# Altium PCB SolarPanel_+X_v2.PcbDoc
Units mm, origin at the board's own origin, x right, y up, seen from the top; angles counter-clockwise.
Board outline 320.5 x 82 mm, 4 copper layers (Top Layer, Power 1, Power 2, Bottom Layer), stack 1.578 mm thick; 8 components, 5 nets, 42 pads, 144 vias.
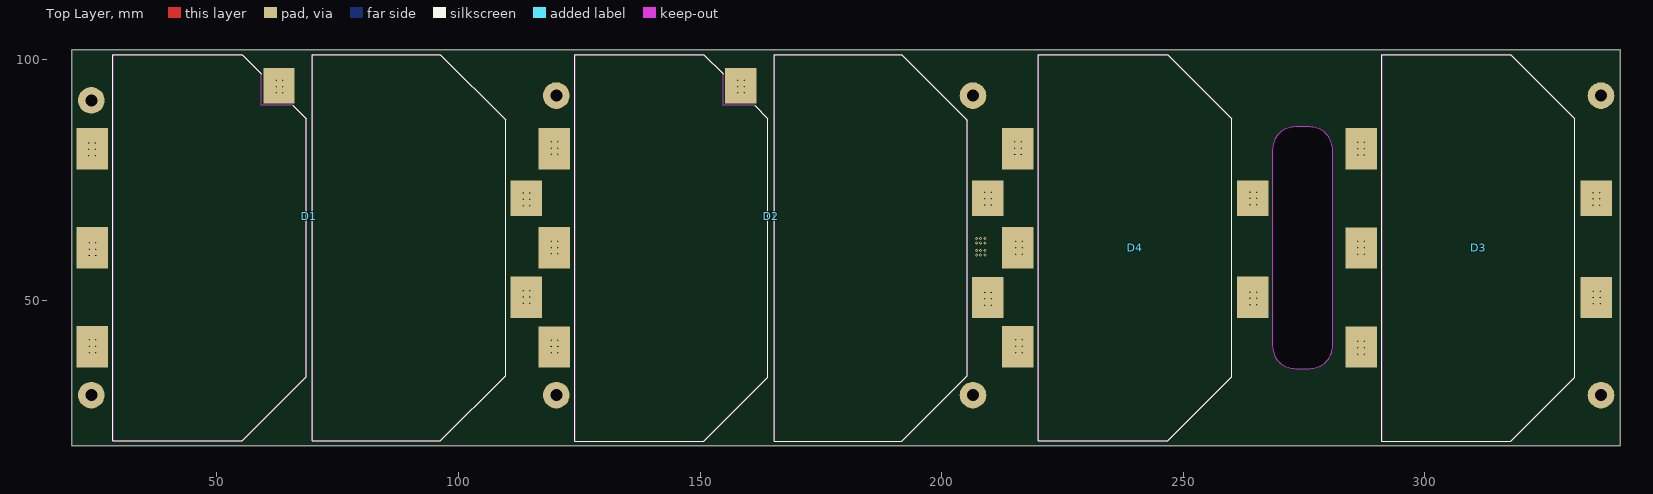
[diagram p0: Top Layer view]
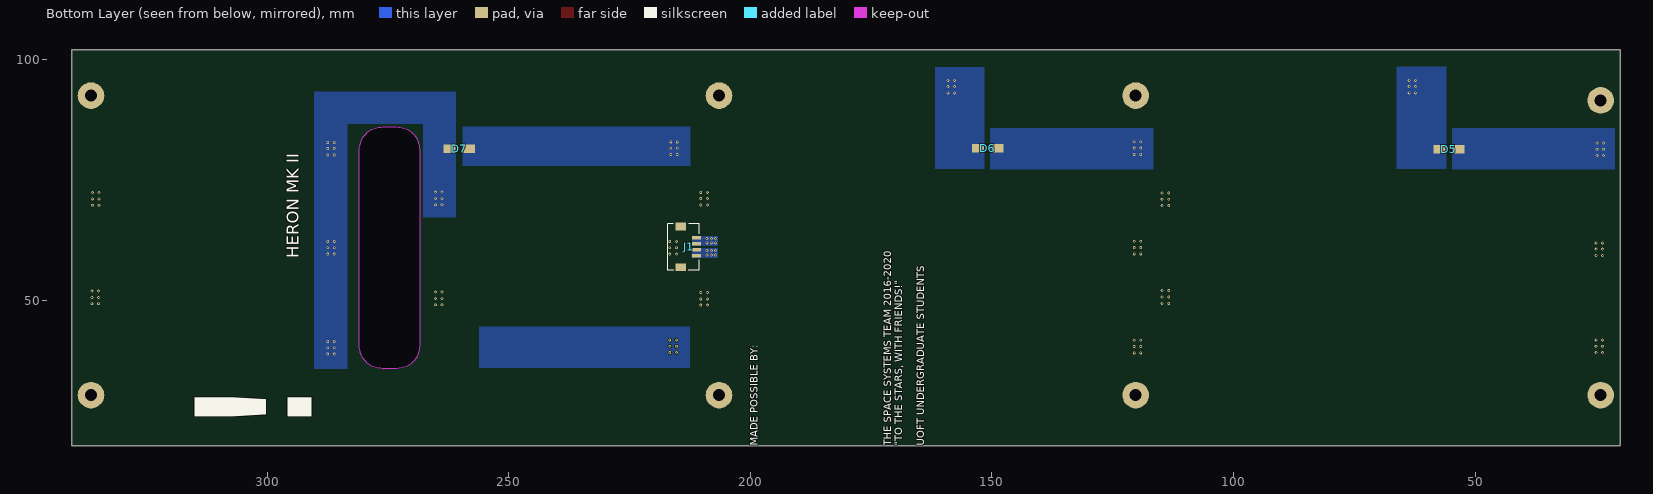
[diagram p1: Bottom Layer view, seen from below]
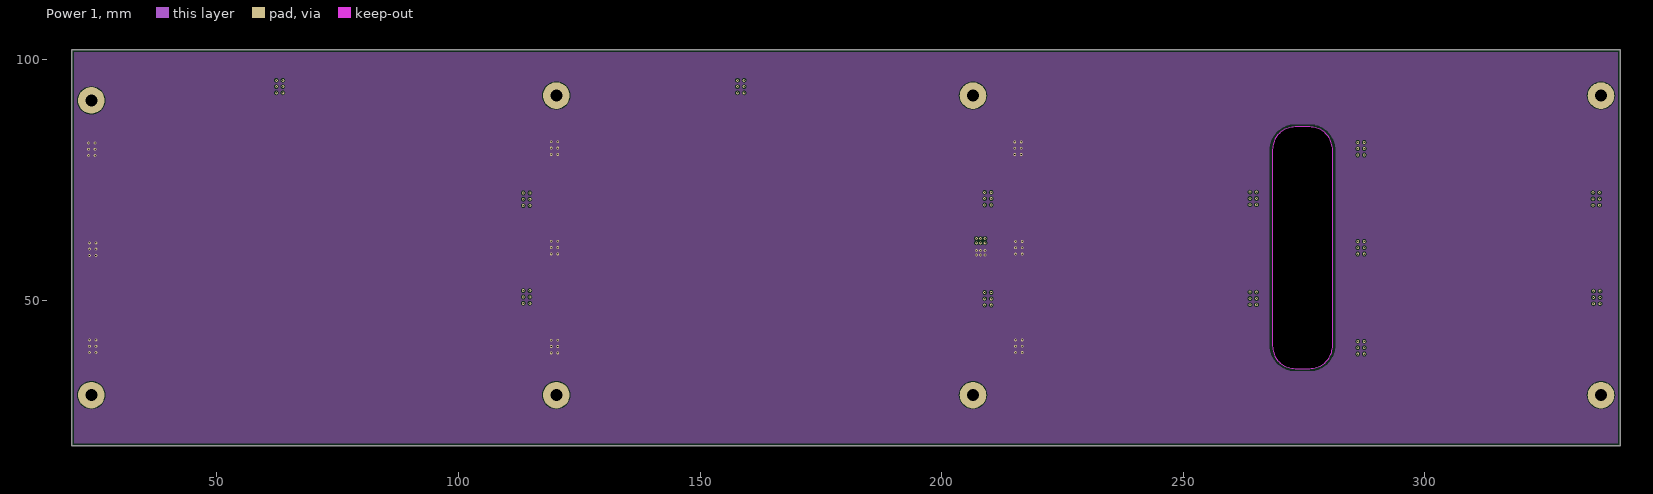
[diagram p2: Power 1]
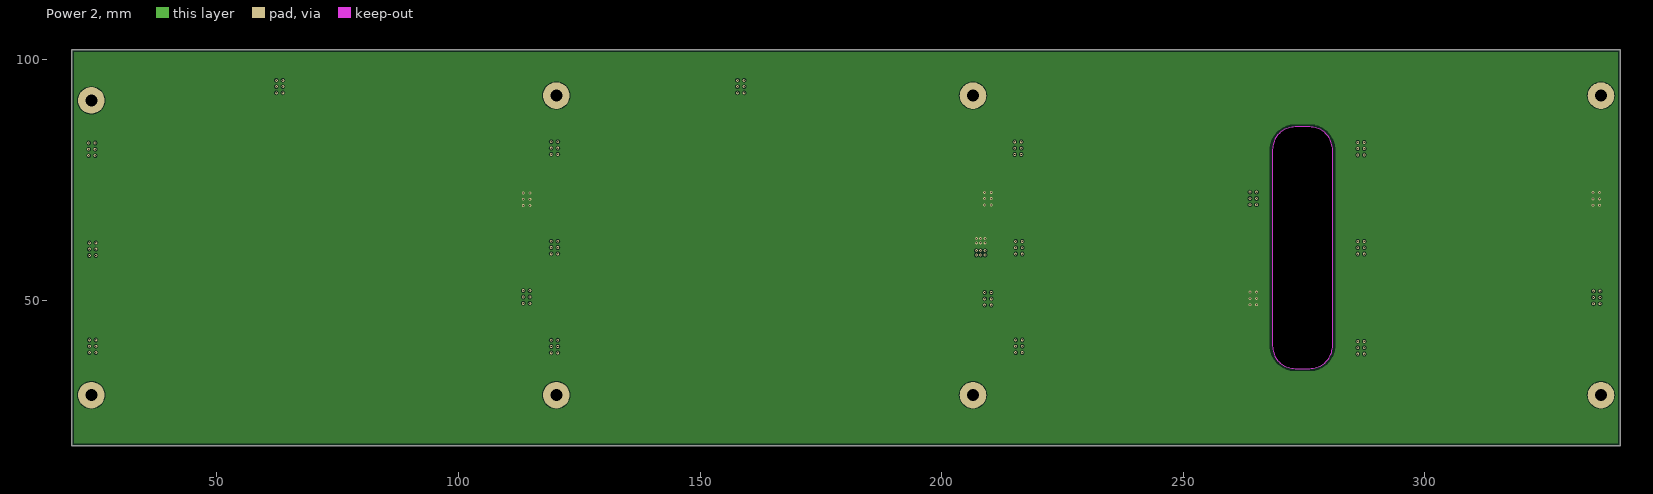
[diagram p3: Power 2]
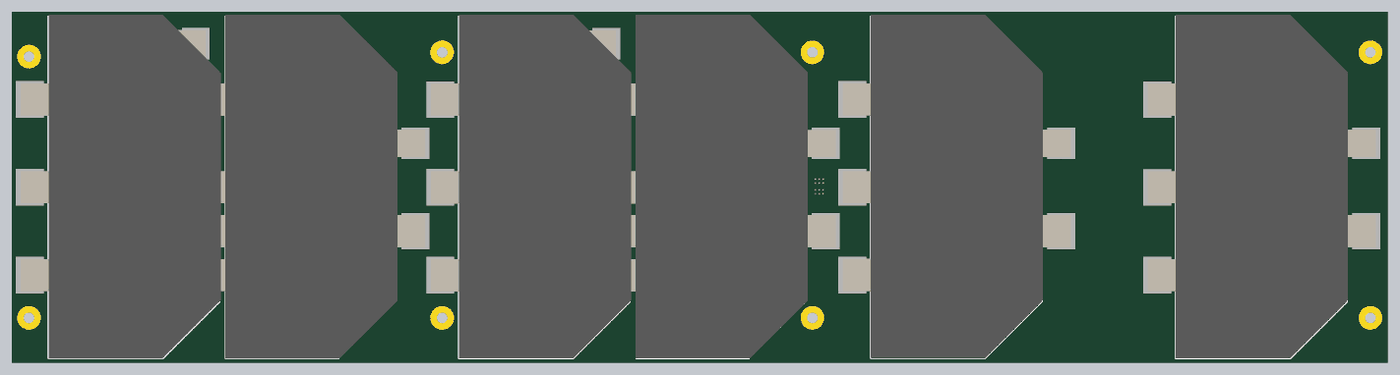
[diagram p4: 3D render of the assembled board from above, using the file's embedded part models]

## Layer stack, top to bottom
Top Solder: solder mask 0.0102, Solder Resist, Dk 3.5
Top Layer: signal copper 0.0356
Dielectric 1: core 0.254, FR-4, Dk 4.2
Power 1: signal copper 0.036
Dielectric 3: prepreg 0.927, Dk 4.2
Power 2: signal copper 0.036
Dielectric 2: core 0.254, Dk 4.2
Bottom Layer: signal copper 0.0356
Bottom Solder: solder mask 0.0102, Solder Resist, Dk 3.5

## Board outline
20,20 340.5,20 340.5,102 20,102
cut-out: 276.2,36 ccw(c276.2,40.75) 280.95,40.75 280.95,81.25 ccw(c276.191,81.241) 276.2,86 273.2,86 ccw(c273.2,81.29) 268.49,81.29 268.49,40.71 ccw(c273.2,40.71) 273.2,36

## Design rules (kind name [scope] priority, off if disabled: settings)
AssemblyTestPointUsage [All] p1 off:
AssemblyTestpoint [All] p1 off: testpointundercomponent=TRUE minsize=1.016 maxsize=2.54 preferedsize=1.524 minholesize=0 maxholesize=1.016 preferedholesize=0.813 testpointgrid=0.025 usegrid=TRUE gridtolerance=0 allowsidetop=TRUE allowsidebottom=TRUE
BoardOutlineClearance [All] p1: gap=0.5 ignorepadtopadclearanceinfootprint=FALSE
Clearance "Stitching GND" [IsStitchingVia and InNet('GND') vs (IsVia and (Not IsStitchingVia)) Or IsPad] p1: gap=0 ignorepadtopadclearanceinfootprint=TRUE
Clearance Component_Clearance [IsComponent vs IsComponent] p2: gap=0.254 ignorepadtopadclearanceinfootprint=FALSE
Clearance [All] p3: gap=0.152 ignorepadtopadclearanceinfootprint=TRUE
FabricationTestPointUsage [All] p1 off: valid=0 allowmultiple=FALSE
FabricationTestpoint [All] p1 off: side=3 testpointundercomponent=FALSE minsize=1.016 maxsize=2.54 preferedsize=1.524 minholesize=0 maxholesize=1.016 preferedholesize=0.813 testpointgrid=0.025 allowsidetop=TRUE allowsidebottom=TRUE usegrid=TRUE gridtolerance=0
HoleSize [All] p1: absolutevalues=TRUE maxlimit=6.3 minlimit=0.3 maxpercent=80.000 minpercent=20.000
HoleToHoleClearance [All] p1: gap=0.2 allowstackedmicrovias=FALSE
MinimumAnnularRing [All] p1: minimumring=0.15
MinimumSolderMaskSliver [All] p1: minsoldermaskwidth=0.1
PlaneClearance [All] p1: clearance=0.381
PlaneConnect [All] p1: planeconnectstyle=Direct reliefexpansion=0.508 reliefentries=4 reliefconductorwidth=0.254 reliefairgap=0.254
PolygonConnect [All] p1: connectstyle=Direct reliefconductorwidth=0.254 reliefentries=4 polygonreliefangle="90 Angle" airgapwidth=0.254
RoutingVias [All] p1: holewidth=0.3 width=0.6 viastyle="Through Hole" minholewidth=0.2 minwidth=0.6 maxholewidth=6.3 maxwidth=10 useviatemplates=TRUE viatemplateguid#1={FDB4C146-A24C-44AB-8A31-89D8144B0BD0} viatemplatename#1=v60h30m0mx0(Tol8-8)
SilkToSilkClearance [All] p1: silktosilkclearance=0
SilkToSolderMaskClearance [IsPad] p1: minsilkscreentomaskgap=0.2 clearancetoexposedcopper=TRUE
SolderMaskExpansion [All] p1: expansion=0.051
UnConnectedPin [All] p1:
UnRoutedNet [All] p1: checkbadconnections=TRUE
Width [All] p1: maxlimit=25.4 minlimit=0.152 preferedwidth=0.2
18 further rules are at their usual default settings.

## Components (designator, comment, footprint, x,y, rotation, side; value= is the part's Value field where it differs from the comment)
D1 "3G30A-2C" 3G30A_2C 25.2,61 r270 top locked
D2 "3G30A-2C" 3G30A_2C 120.8,60.981 r270 top locked
D3 "3G30A" 3G30A 287.85,60.975 r270 top locked
D4 "3G30A" 3G30A 216.8,61 r270 top locked
D5 "B340A-13-F" B340A-13-F 55.4,81.4 r0 bottom
D6 "B340A-13-F" B340A-13-F 150.9,81.6 r0 bottom
D7 "B340A-13-F" B340A-13-F 260.3,81.5 r0 bottom
J1 "DF13A-4P-1.25H(51)" DF13A-4P-1.25H(51) 213.1,59.939 r90 bottom

## Footprints (in the part's own frame and the unit in brackets; to place one, negate y for a bottom-side part, rotate by r counter-clockwise, add the part's x,y. Pads: shape width x height; smd on the part's side, far side on the other; paste and mask are expansions set on the pad)
3G30A [mm]
  rect 7.35x6.5 smd: 1(-10.25,47.65)
  rect 8.53x6.5 smd: 2(-20.5,-1) 2(0,-1) 2(20.5,-1) 3(10.25,47.65)
  Top Layer keep-out region: -26.75,43.25 -40,30 -40,3.25 40,3.25 40,30 26.75,43.25
  silkscreen extent -40,3.25 40,43.25, body extent -40.27,-3.25 39.87,49.9, height 0.38
3G30A_2C [mm]
  rect 7.35x6.5 smd: 1(-10.25,88.8) 4(-33.52,37.65)
  rect 8.53x6.5 smd: 2(-20.5,-1) 2(0,-1) 2(20.5,-1) 3(10.25,88.8)
  Top Layer keep-out region: -40,30 -40,3.25 40,3.25 40,30 26.75,43.25 -26.75,43.25 -29.5,40.5 -29.5,34 -36,34
  Top Layer keep-out region: -26.45,84.55 -40,71 -40,44.55 40,44.55 40,71 26.45,84.55
  silkscreen extent -40,3.25 40,84.55, body extent -40.25,-3.15 39.9,91.15, height 0.52
B340A-13-F [mm]
  rect 2.5x1.7 smd: 1(-2,0) 2(2,0)
  body extent -2.3,-1.5 2.3,1.5, height 2.4
DF13A-4P-1.25H(51) [mm] "4 pos, 1.25mm pitch DF13 connector (H125779CT-ND)"
  rect 0.7x1.8 smd: 1(-0.625,-1.956) 2(0.625,-1.956) 3(1.875,-1.956) 4(3.125,-1.956)
  rect 1.6x2.2 smd: ""(-2.975,1.344) ""(5.475,1.344)
  silkscreen extent -3.61,-2.46 6.06,4.04, body extent -3.61,-2.46 6.04,4.75, height 3.58

## Part data
D1 D2: "Solar cell x2"
D3 D4: "Single solar cell"
D5 D6 D7: "Schottky diode", Supplier Part Number 1=B340A-FDICT-ND, Supplier 1=Digi-Key
J1: "4 pos DF13 right angle surface mount connector", Supplier Part Number 1=H125779CT-ND, Supplier 1=Digi-Key

## Free pads (board coordinates)
  round 5.5 hole 2.5 unplated: ""(24,30.5) ""(24,91.5) ""(120.25,30.5) ""(120.25,92.5) ""(206.5,30.5) ""(206.5,92.5) ""(336.5,30.5) ""(336.5,92.5)

## Via types
v1: diameter 0.6, hole 0.3, Top Layer to Bottom Layer, tented both sides, 144 vias

## Nets (pads, with @x,y where several pads share a name; then routed paths per layer and width w, separated by ;. In a path a pad name is that pad's centre, name@x,y a point inside that pad or via, vN(x,y) a via of type N, cw(c..) or ccw(c..) an arc to the next point about the centre after c; other vN are vias at no path point)
D4+VE: D3.2 D4.1 D7.2
  other v1: 286.142,39 287.5,39 286.142,40.306 287.5,40.306 286.142,41.611 287.5,41.611 286.142,59.7 287.5,59.7 286.142,61.006 287.5,61.006 286.142,62.311 287.5,62.311 263.842,69.9 265.2,69.9 263.842,71.206 265.2,71.206 263.842,72.511 265.2,72.511 286.142,80.2 287.5,80.2 286.142,81.506 287.5,81.506 286.142,82.811 287.5,82.811
GND: D1.2 D2.2 D4.2 D5.1 D6.1 D7.1 J1.1 J1.2
  other v1: 119.2,39.25 120.558,39.25 23.592,39.3 24.95,39.3 215.342,39.3 216.7,39.3 119.2,40.556 120.558,40.556 23.592,40.606 24.95,40.606 215.342,40.606 216.7,40.606 119.2,41.861 120.558,41.861 23.592,41.911 24.95,41.911 215.342,41.911 216.7,41.911 23.592,59.4 24.95,59.4 207.2,59.5 208.1,59.5 209,59.5 215.342,59.7 216.7,59.7 119.2,59.739 120.558,59.739 207.2,60.4 208.1,60.4 209,60.4 23.592,60.706 24.95,60.706 215.342,61.006 216.7,61.006 119.2,61.044 120.558,61.044 23.592,62.011 24.95,62.011 215.342,62.311 216.7,62.311 119.2,62.35 120.558,62.35 23.442,80.075 24.8,80.075 215.142,80.3 216.5,80.3 119.2,80.325 120.558,80.325 23.442,81.381 24.8,81.381 215.142,81.606 216.5,81.606 119.2,81.631 120.558,81.631 23.442,82.686 24.8,82.686 215.142,82.911 216.5,82.911 119.2,82.936 120.558,82.936
NetD1_4: D1.4 D5.2
  other v1: 62.292,93.05 63.65,93.05 62.292,94.356 63.65,94.356 62.292,95.661 63.65,95.661
NetD2_4: D2.4 D6.2
  other v1: 157.767,93.05 159.125,93.05 157.767,94.356 159.125,94.356 157.767,95.661 159.125,95.661
VCC_SOLAR: D1.1 D2.1 D3.1 D4.3 J1.3 J1.4
  other v1: 263.842,49.2 265.2,49.2 263.842,50.506 265.2,50.506 263.842,51.811 265.2,51.811 207.2,62 208.1,62 209,62 207.2,62.9 208.1,62.9 209,62.9 113.417,69.725 114.775,69.725 334.842,69.8 336.2,69.8 208.917,69.85 210.275,69.85 113.417,71.031 114.775,71.031 334.842,71.106 336.2,71.106 208.917,71.156 210.275,71.156 113.417,72.336 114.775,72.336 334.842,72.411 336.2,72.411 208.917,72.461 210.275,72.461
pads on no net: D1.3 D2.3 D3.3 J1.
copper on no net:
  other v1: 208.917,49.125 210.275,49.125 334.942,49.4 336.3,49.4 113.417,49.5 114.775,49.5 208.917,50.431 210.275,50.431 334.942,50.706 336.3,50.706 113.417,50.806 114.775,50.806 208.917,51.736 210.275,51.736 334.942,52.011 336.3,52.011 113.417,52.111 114.775,52.111

## Polygon pours and split planes (outlines as drawn)
GND on Power 1 "GND_L02_P000" (solid, pour order 0): 20,102 20,20 340.5,20 340.5,102
VCC_SOLAR on Power 2 "VCC_SOLAR_L03_P004" (solid, pour order 4): 20.011,102.009 20.011,20.009 340.511,20.009 340.511,102.009
GND on Bottom Layer "GND_L04_P042" (solid, pour order 42): 212.5,86 212.5,78 259.6,78 259.6,86
no net on Bottom Layer "NONET_L04_P040" (solid, pour order 40): 212.55,44.65 212.55,36.125 212.575,36.15 256.1,36.15 256.1,44.65
D4+VE on Bottom Layer "D4+VE_L04_P034" (solid, pour order 34): 267.7,67.3 267.7,86.7 283.5,86.7 283.5,36 290.3,36 290.3,93.3 261,93.3 261,67.3
GND on Bottom Layer "GND_L04_P032" (solid, pour order 32): 212.1,60.939 212.1,58.964 206.75,58.964 206.75,60.939
VCC_SOLAR on Bottom Layer "VCC_SOLAR_L04_P030" (solid, pour order 30): 212.075,63.425 212.075,61.45 206.725,61.45 206.725,63.425
NetD2_4 on Bottom Layer "NETD2_4_L04_P024" (solid, pour order 24): 151.6,77.35 161.775,77.35 161.775,98.4 151.6,98.4
GND on Bottom Layer "GND_L04_P022" (solid, pour order 22): 116.65,85.75 116.65,77.225 116.675,77.25 150.325,77.25 150.325,85.7 150.25,85.775 150.225,85.75
GND on Bottom Layer "GND_L04_P020" (solid, pour order 20): 21.05,85.775 21.05,77.25 21.075,77.275 54.725,77.275 54.725,85.725 54.65,85.8 54.625,85.775
NetD1_4 on Bottom Layer "NETD1_4_L04_P018" (solid, pour order 18): 56,77.375 66.175,77.375 66.175,98.425 56,98.425

## Other copper
Bottom Layer:
  pour cut-out: 268.6,30.9

## Silkscreen, mask and mechanical layers (free items; w line width, h text height)
Bottom Overlay:
  text "HERON MK II" at 293.5,58.8 h2.5 r270
  text "THE SPACE SYSTEMS TEAM 2016-2020 / \"TO THE STARS, WITH FRIENDS!\" /  / UOFT UNDERGRADUATE STUDENTS" at 164,20 h1.52 r270
  text "MADE POSSIBLE BY:" at 198.446,20 h1.52 r270
  text "!" at 281.4,20 h50 r270